# Altium PCB PCB1.PcbDoc
Units mil, origin at the board's own origin, x right, y up, seen from the top; angles counter-clockwise.
Board outline 1700 x 2100 mil, 2 copper layers (Top Layer, Bottom Layer); 15 components, 17 nets, 74 pads, 0 vias.
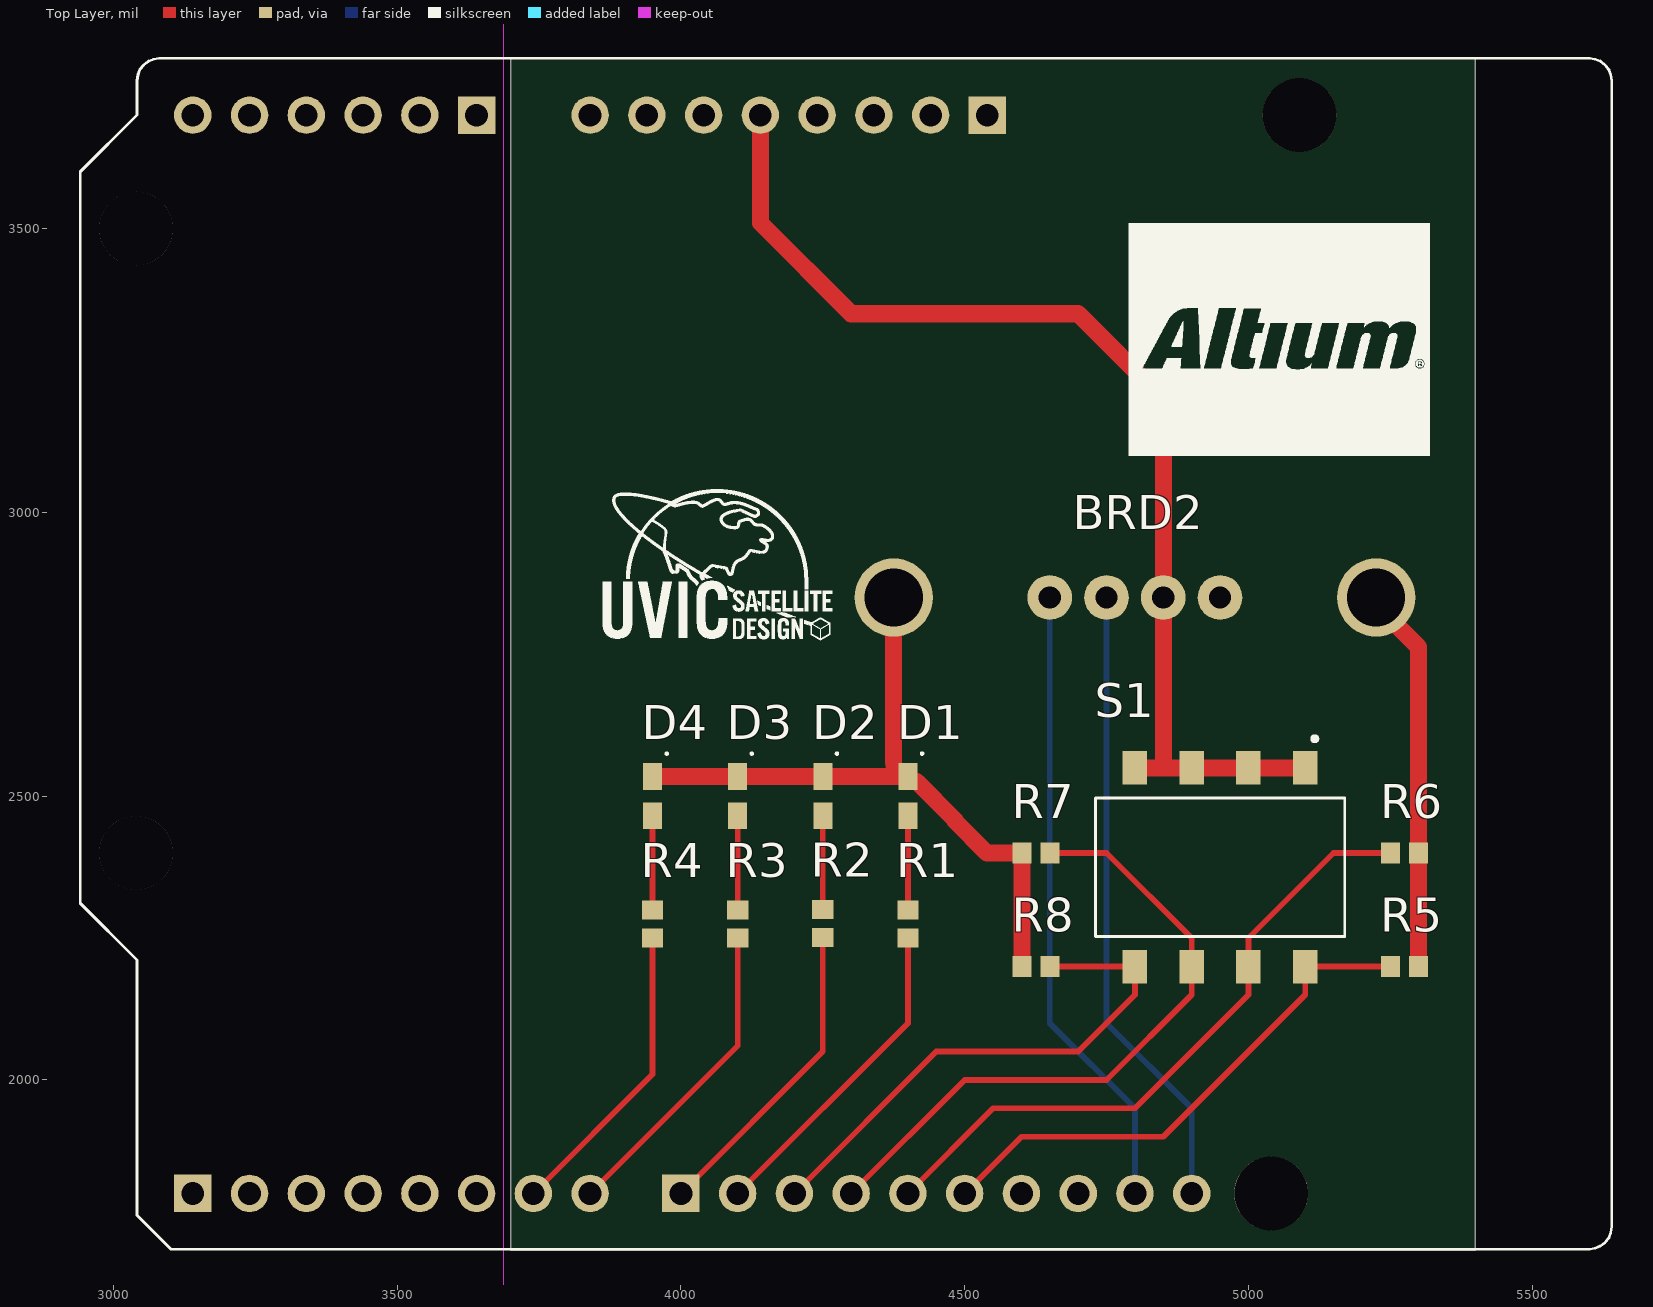
[diagram p0: Top Layer view]
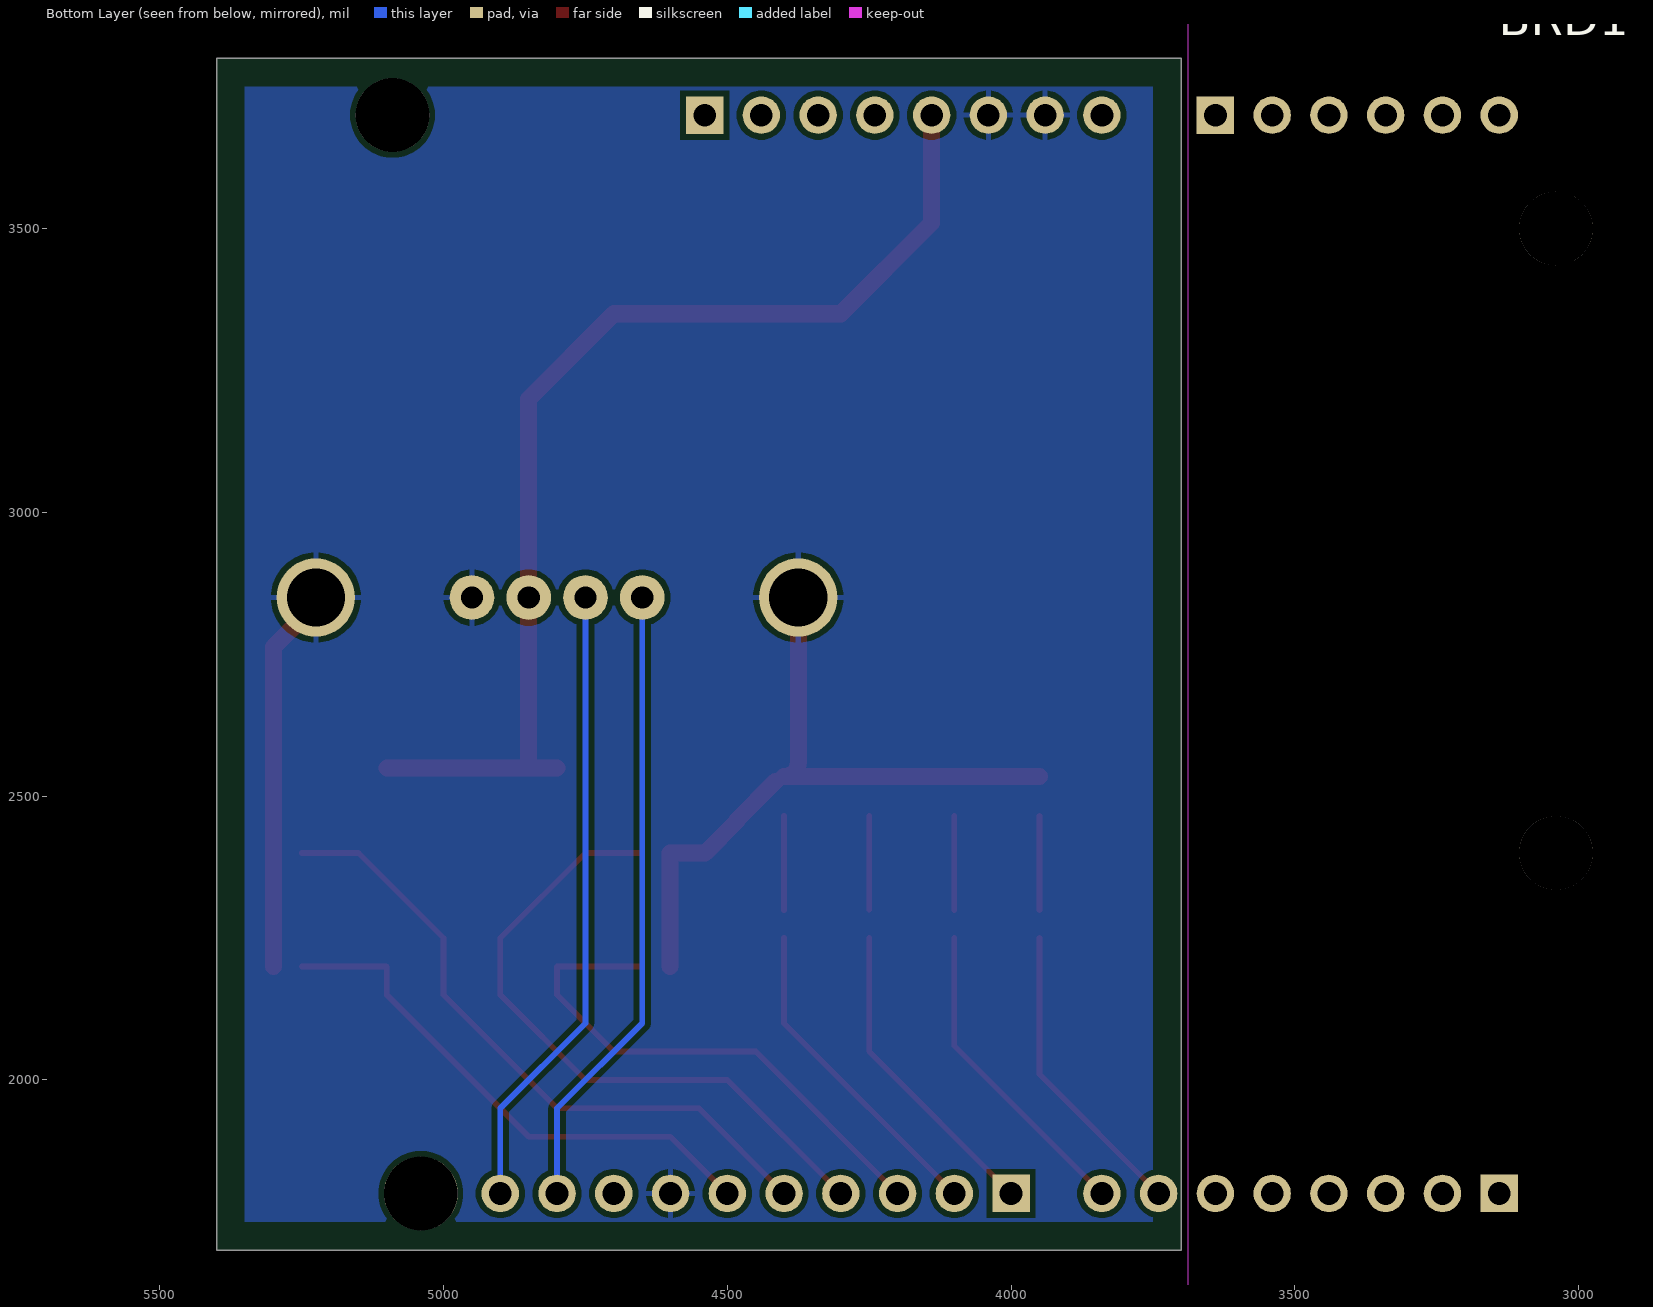
[diagram p1: Bottom Layer view, seen from below]

## Layer stack, top to bottom
Top Solder: solder mask 0.4, Solder Resist, Dk 3.5
Top Layer: signal copper 1.4
Dielectric 1: dielectric 12.6, FR-4, Dk 4.8
Bottom Layer: signal copper 1.4
Bottom Solder: solder mask 0.4, Solder Resist, Dk 3.5

## Board outline
3700,3800 3700,1700 5400,1700 5400,3800 4250,3800
cut-out: 3688,1550 3688,3950 2700,3950 2700,3750 2700,1550

## Design rules (kind name [scope] priority, off if disabled: settings)
Clearance [All] p1: gap=10 ignorepadtopadclearanceinfootprint=FALSE except(0: Arc-Hole Track-Hole SMDPad-Hole THPad-Hole Via-Hole Fill-Hole Poly-Hole Region-Hole Text-Hole)
HoleSize [All] p1: absolutevalues=TRUE maxlimit=250 minlimit=7.88 maxpercent=80.000 minpercent=20.000
MinimumSolderMaskSliver [All] p1: minsoldermaskwidth=5
PolygonConnect [All] p1: connectstyle=Relief reliefconductorwidth=10 reliefentries=4 polygonreliefangle="90 Angle" airgapwidth=10
RoutingVias [All] p1: holewidth=28 width=50 viastyle="Through Hole" minholewidth=28 minwidth=50 maxholewidth=28 maxwidth=50
SolderMaskExpansion [All] p1: expansion=4 istentingtop=FALSE
Width [All] p1: maxlimit=30 minlimit=5 preferedwidth=10 minimp=50.000000 maximp=50.000000 favimp=50.000000
28 further rules are at their usual default settings.

## Components (designator, comment, footprint, x,y, rotation, side; value= is the part's Value field where it differs from the comment)
BRD1 "A000066" ARDUINO_A000066 3140,3700 r0 bottom locked
BRD2 "I2C Screen Board" "SSD1306 I2C Screen" 4950,2850 r180 top
D1 "Light-Emitting Diode" "Harvatek 0603 LED" 4400,2500 r90 top
D2 "Light-Emitting Diode" "Harvatek 0603 LED" 4250,2500 r90 top
D3 "Light-Emitting Diode" "Harvatek 0603 LED" 4100,2500 r90 top
D4 "Light-Emitting Diode" "Harvatek 0603 LED" 3950,2500 r90 top
R1 "RES_RMCF0603FT10K0" RES_RMCF0603 4400,2274.61 r270 top
R2 "RES_RMCF0603FT10K0" RES_RMCF0603 4250,2275.39 r270 top
R3 "RES_RMCF0603FT10K0" RES_RMCF0603 4100,2274.61 r270 top
R4 "RES_RMCF0603FT10K0" RES_RMCF0603 3950,2274.61 r270 top
R5 "RES_RMCF0603FT10K0" RES_RMCF0603 5274.61,2200 r180 top
R6 "RES_RMCF0603FT10K0" RES_RMCF0603 5274.61,2400 r180 top
R7 "RES_RMCF0603FT10K0" RES_RMCF0603 4625.39,2400 r0 top
R8 "RES_RMCF0603FT10K0" RES_RMCF0603 4625.39,2200 r0 top
S1 "DS04-254-2-04BK-SMT" SW_DS04-254-2-04BK-SMT 4950,2374.8 r270 top

## Footprints (in the part's own frame and the unit in brackets; to place one, negate y for a bottom-side part, rotate by r counter-clockwise, add the part's x,y. Pads: shape width x height; smd on the part's side, far side on the other; paste and mask are expansions set on the pad)
ARDUINO_A000066 [mil]
  round 66 hole 40: 3V3(1100,0) 5V(1000,0) A1(400,0) A2(300,0) A3(200,0) A4(100,0) A5(0,0) AREF(1560,1900) D1(100,1900) D2(200,1900) D3(300,1900) D4(400,1900) D5(500,1900) D6(600,1900) D7(700,1900) D9(960,1900) D10(1060,1900) D11(1160,1900) D12(1260,1900) D13(1360,1900) GND_1(800,0) GND_2(900,0) GND_3(1460,1900) IOREF(1300,0) RST(1200,0) SCL(1760,1900) SDA(1660,1900) VIN(700,0)
  rect 66x66 / inner round 66 / far side rect 66x66 hole 40: A0(500,0) D0(0,1900) D8(860,1900) P1(1400,0)
  round 129.92 hole 129.92 unplated: ""(-100,200) ""(-100,1300) ""(1900,1900) ""(1950,0)
"Harvatek 0603 LED" [mm]
  rect 1.2x0.85 smd: 1(-0.875,0) 2(0.875,0)
  silkscreen extent 1.86,-0.68 1.95,-0.59, body extent -1.25,-0.4 1.25,0.4, height 0.4
RES_RMCF0603 [mm] "Footprint for RMCF0603FT10K0 Resistor"
  rect 0.85x0.95 smd: 1(-0.625,0) 2(0.625,0)
  body extent -0.85,-0.48 0.85,0.48, height 0.6
"SSD1306 I2C Screen" [mm] "Footprint for SSD1306 I2C screen on seperate board"
  round 3.5 hole 2.6: 1(-6.985,0) 1(14.605,0)
  round 2 hole 1: 1(0,0) 2(2.54,0) 3(5.08,0) 4(7.62,0)
SW_DS04-254-2-04BK-SMT [mm]
  rect 1.5x1.1 smd: 1A(-4.45,3.81) 1B(4.45,3.81) 2A(-4.45,1.27) 2B(4.45,1.27) 3A(-4.45,-1.27) 3B(4.45,-1.27) 4A(-4.45,-3.81) 4B(4.45,-3.81)
  silkscreen extent -5.85,-5.58 3.1,5.58

## Part data
BRD1: "Microcontroller board based on the ATmega328P.", Package="Non-Standard Arduino", Availability="Not in stock", Check_prices=https://www.snapeda.com/parts/Arduino%20Uno%20Rev3/Arduino/view-part/?ref=eda, MF=Arduino, MP="Arduino Uno Rev3", Price=None, SnapEDA_Link=https://www.snapeda.com/parts/Arduino%20Uno%20Rev3/Arduino/view-part/?ref=snap
BRD2: library part "SSD1306 I2C Screen", "Hosyond 0.96 Inch OLED I2C IIC Display Module 12864 128x64 Pixel SSD1306 Mini Self-Luminous OLED Screen Board"
D1 D2 D3 D4: library part LED, AF=1, BV=0, BV_MAX=1e99, CJO=0, CJP=0, CTA=0, CTP=0, EG=1.11, FC=0.5, FCS=0.5, FV_MAX=1e99, IBV=0.001, IKF=0, IKR=0, IS=1e-14, ISR=1e-14, JSW=0, JTUN=0, JTUNSW=0, KEG=1, KF=0, LEVEL=1, MJSW=0.33, N=1, NBV=1, NR=1, NS=1, NTUN=30, PHP=1, RS=0, SimulationGenericComponent=True, TCV=0, TLEV=0, TLEVC=0, TM1=0, TM2=0, TNOM=27, TPB=0, TPHP=0, TRS=0, TRS2=0, TT=0, TTT1=0, TTT2=0, VJ=1, XTI=3, XTITUN=3
R1 R2 R3 R4 R5 R6 R7 R8: "RES 10K OHM 1% 1/10W 0603", Manufacturer="Stackpole Electronics Inc", Part Number=RMCF0603FT10K0
S1: "4 Position, Surface Mount, 2.54 mm Pitch, Flat Slide Actuator, Flat Bottom, SMT Pin, DIP Switch", Package=None, Availability="In Stock", Check_prices=https://www.snapeda.com/parts/DS04-254-2-04BK-SMT/CUI+Devices/view-part/?ref=eda, CUI_purchase_URL=https://www.cuidevices.com/product/switches/dip-switches/ds04-254-smt-series?utm_source=snapeda.com&utm_medium=referral&utm_campaign=snapedaBOM, MF="CUI Devices", MP=DS04-254-2-04BK-SMT, Price=None, Purchase-URL=https://pricing.snapeda.com/search/part/DS04-254-2-04BK-SMT/?ref=eda, SnapEDA_Link=https://www.snapeda.com/parts/DS04-254-2-04BK-SMT/CUI+Devices/view-part/?ref=snap

## Nets (pads, with @x,y where several pads share a name; then routed paths per layer and width w, separated by ;. In a path a pad name is that pad's centre, name@x,y a point inside that pad or via, vN(x,y) a via of type N, cw(c..) or ccw(c..) an arc to the next point about the centre after c; other vN are vias at no path point)
+5: BRD1.5V BRD2.2 S1.1A S1.2A S1.3A S1.4A | length 1978.4
  Top Layer w30: BRD1.5V 4140,3510 4300,3350 4700,3350 4850,3200 BRD2.2 4850,2550 ; S1.4A 4850,2550 ; S1.1A S1.2A S1.3A 4850,2550
GND: BRD1.GND_1 BRD1.GND_2 BRD1.GND_3 BRD2.1 D1.2 D2.2 D3.2 D4.2 R5.1 R6.1 R7.1 R8.1 | length 1899.3
  Top Layer w30: D4.2 D3.2 D2.2 D1.2 cw(c4400,2559.45) 4375,2559.45 BRD2.1@4375,2850 ; D1.2@4415.43,2525.83 4483.07,2458.19 4483.07,2455.98 4539.06,2400 R7.1 R8.1 ; BRD2.1@5225,2850 5225,2837.35 5299.21,2763.14 R6.1 R5.1
LED1: BRD1.D9 R1.2 | length 574.3
  Top Layer w10: BRD1.D9 4400,2100 R1.2
LED2: BRD1.D8 R2.2 | length 554.3
  Top Layer w10: BRD1.D8 4250,2050 R2.2
LED3: BRD1.D7 R3.2 | length 557.7
  Top Layer w10: BRD1.D7 4100,2060 R3.2
LED4: BRD1.D6 R4.2 | length 537
  Top Layer w10: BRD1.D6 3950,2010 R4.2
NetBRD1_A0: BRD1.A0
NetD1_1: D1.1 R1.1 | length 166.3
  Top Layer w10: R1.1 D1.1
NetD2_1: D2.1 R2.1 | length 165.6
  Top Layer w10: R2.1 D2.1
NetD3_1: D3.1 R3.1 | length 166.3
  Top Layer w10: R3.1 D3.1
NetD4_1: D4.1 R4.1 | length 166.3
  Top Layer w10: R4.1 D4.1
SCL: BRD1.SCL BRD2.3 | length 1112.1
  Bottom Layer w10: BRD2.3 4750,2100 4900,1950 BRD1.SCL
SDA: BRD1.SDA BRD2.4 | length 1112.1
  Bottom Layer w10: BRD2.4 4650,2100 4800,1950 BRD1.SDA
SW1: BRD1.D13 R5.2 S1.1B | length 944.7
  Top Layer w10: BRD1.D13 4600,1900 4850,1900 5100,2150 S1.1B 5100.39,2200 R5.2
SW2: BRD1.D12 R6.2 S1.2B | length 1157.1
  Top Layer w10: BRD1.D12 4550,1950 4800,1950 5000,2150 S1.2B 5000,2250 5150,2400 R6.2
SW3: BRD1.D11 R7.2 S1.3B | length 1157.1
  Top Layer w10: BRD1.D11 4500,2000 4750,2000 4900,2150 4900,2191.73 S1.3B 4900,2250 4750,2400 R7.2
SW4: BRD1.D10 R8.2 S1.4B | length 944.7
  Top Layer w10: BRD1.D10 4450,2050 4700,2050 4800,2150 S1.4B 4799.61,2200 R8.2
pads on no net: BRD1. BRD1.3V3 BRD1.A1 BRD1.A2 BRD1.A3 BRD1.A4 BRD1.A5 BRD1.AREF BRD1.D0 BRD1.D1 BRD1.D2 BRD1.D3 BRD1.D4 BRD1.D5 BRD1.IOREF BRD1.P1 BRD1.RST BRD1.VIN

## Polygon pours and split planes (outlines as drawn)
GND on Bottom Layer "GND_L02_P000" (solid, pour order 0): 3750,3750 3750,1750 5350,1750 5350,3750

## Silkscreen, mask and mechanical layers (free items; w line width, h text height)
Top Overlay:
  drawing of 30 lines, arcs and shapes, not listed
Mechanical 1:
  lines w10: 3700,1700 5400,1700 5400,3800 3700,3800 3700,1700